# Altium PCB IBMExtender.PcbDoc (part 1 of 3)
Units mm, origin at the board's own origin, x right, y up, seen from the top; angles counter-clockwise.
Board outline 203.2 x 105.41 mm, 4 copper layers (F.Cu, In1.Cu, In2.Cu, B.Cu); 44 components, 158 nets, 598 pads, 425 vias.
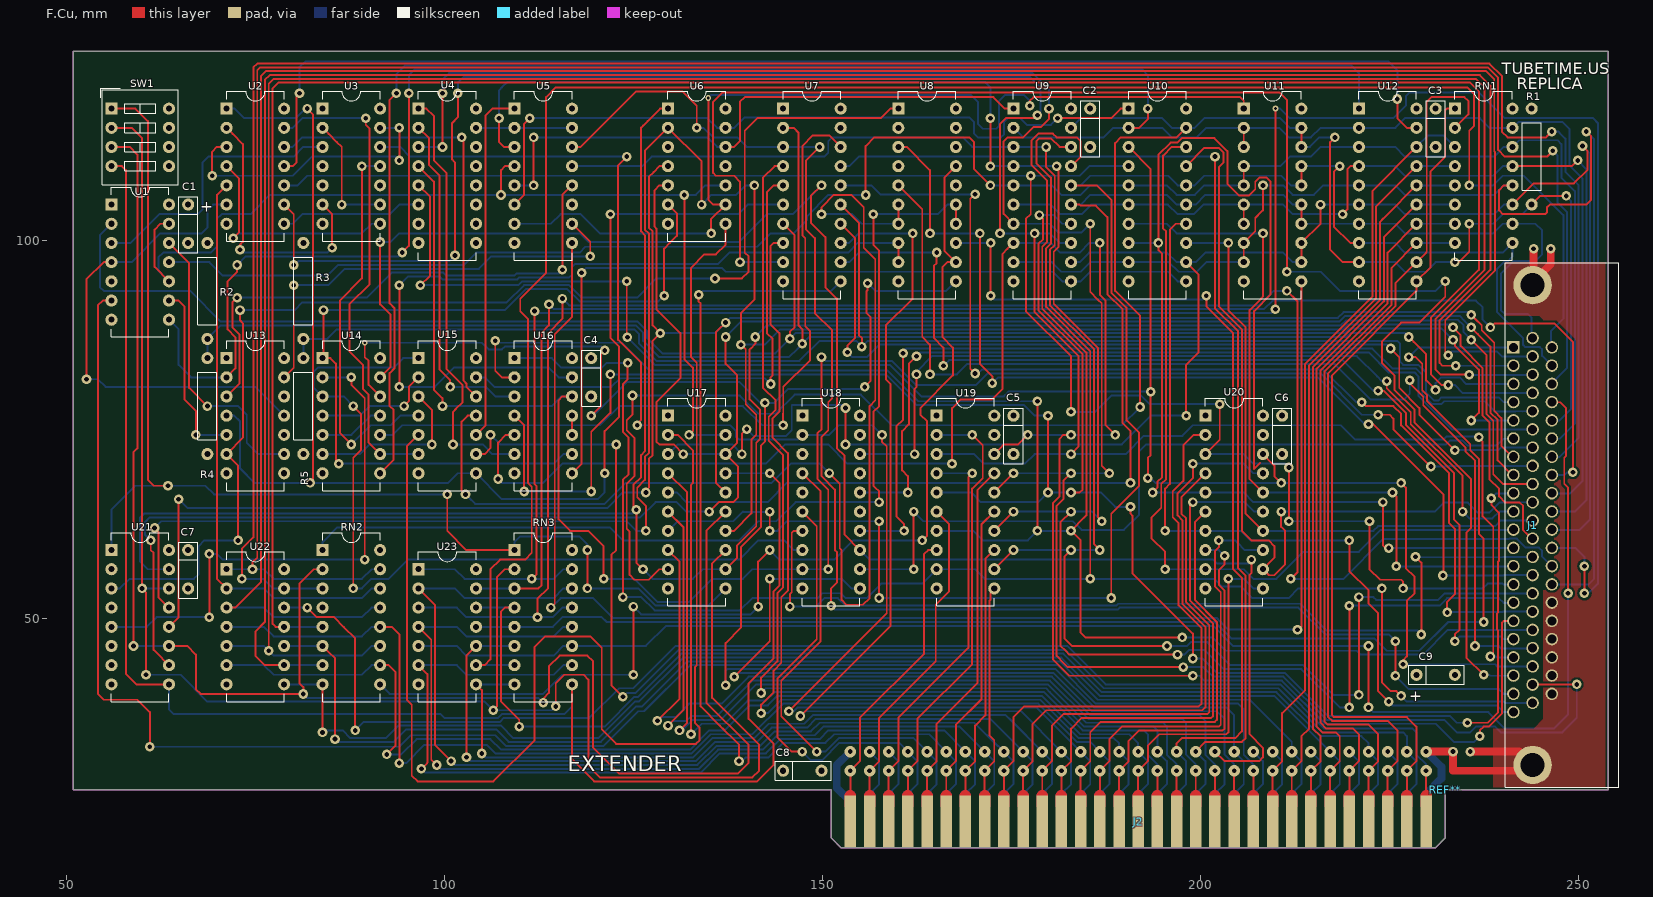
[diagram p0: F.Cu view]
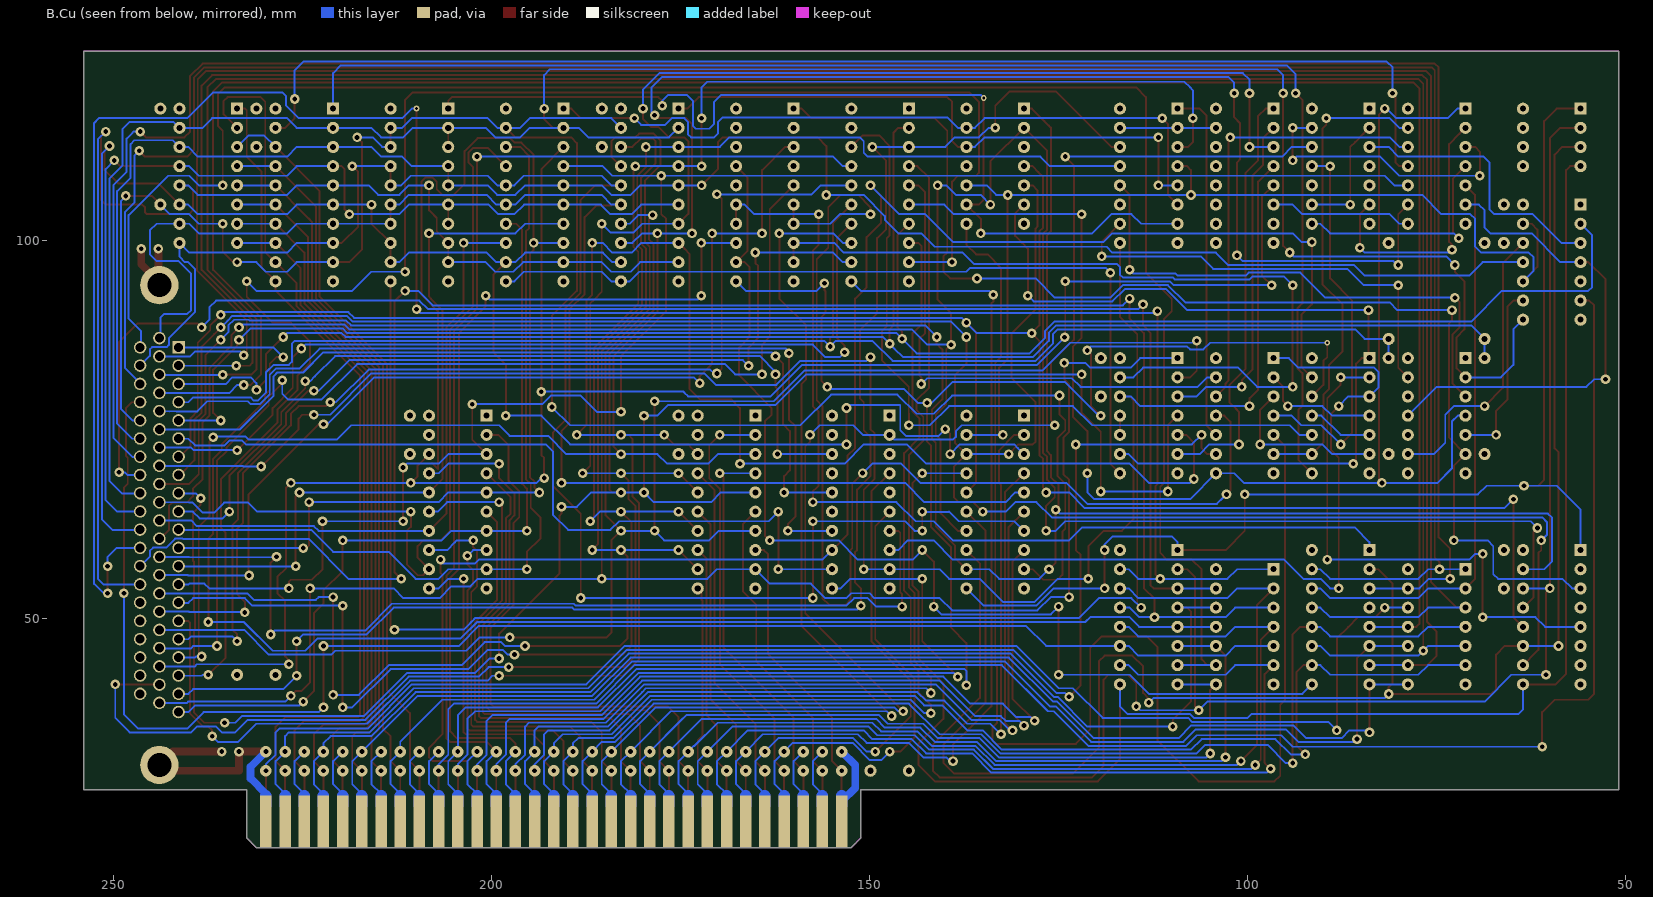
[diagram p1: B.Cu view, seen from below]
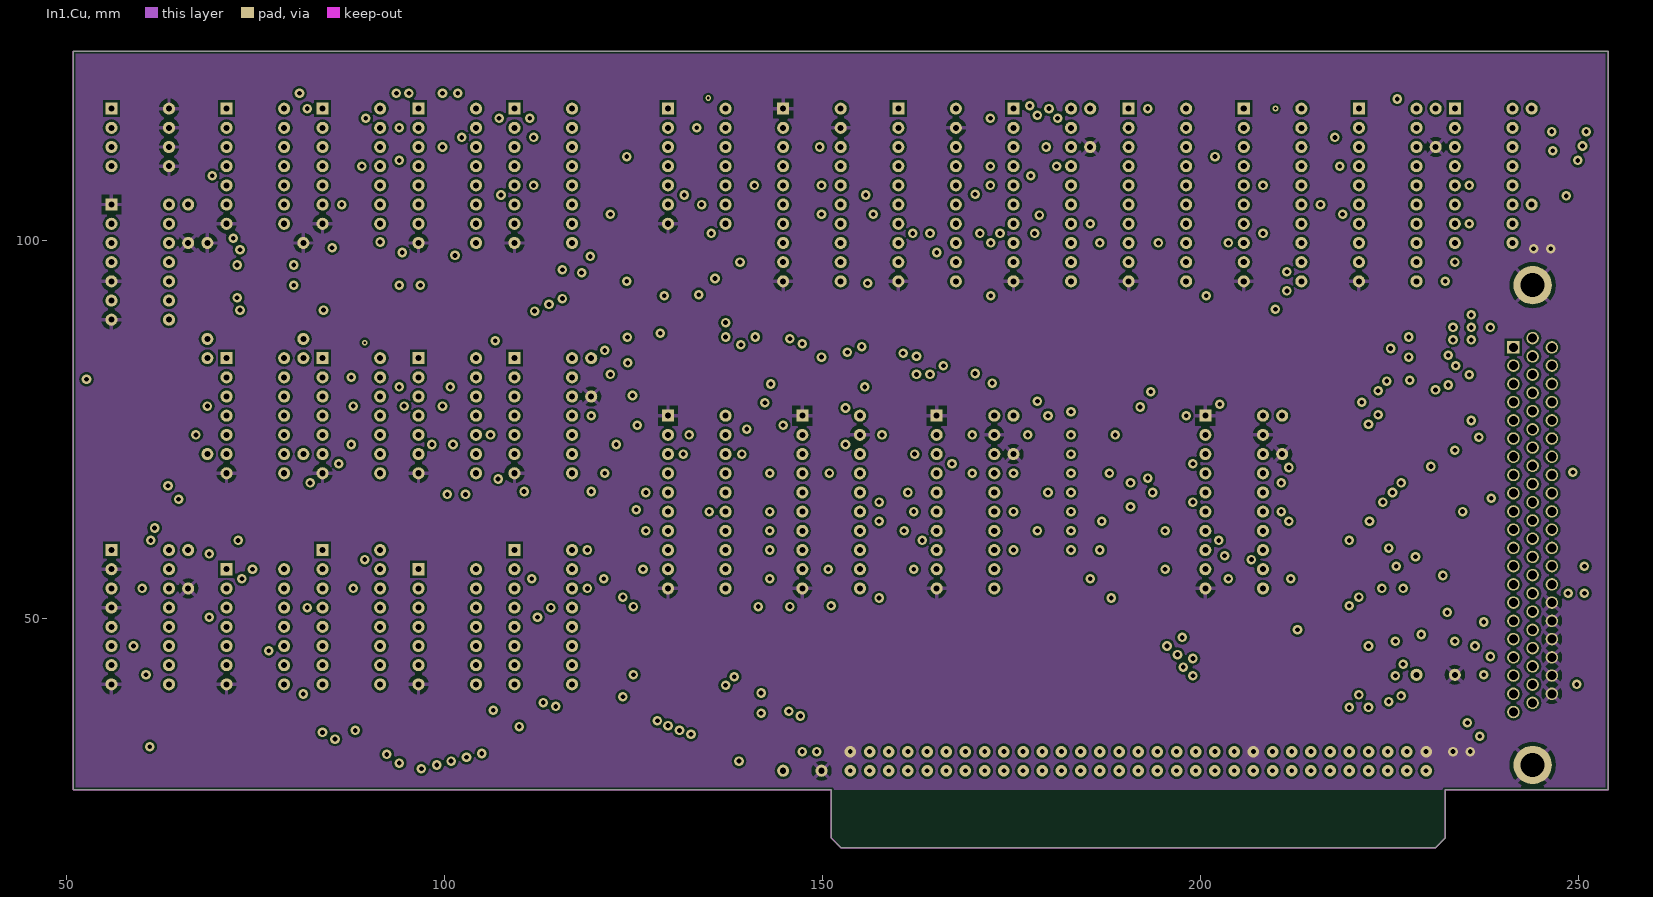
[diagram p2: In1.Cu]
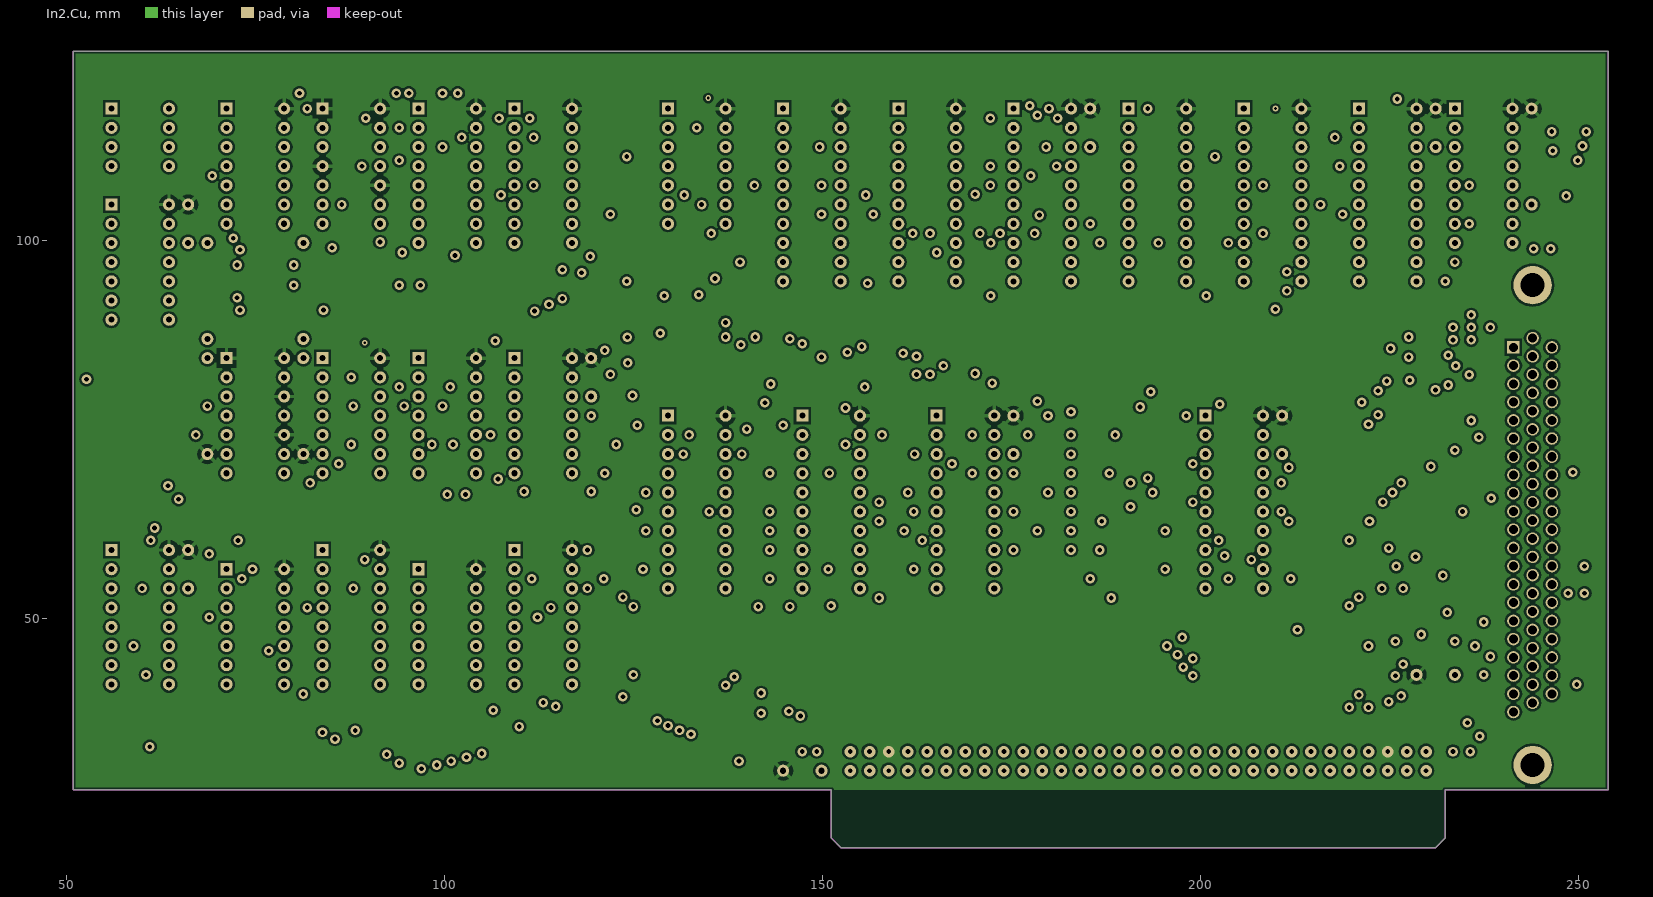
[diagram p3: In2.Cu]

## Layer stack, top to bottom
F.Mask: solder mask 0.0102, Solder Resist, Dk 3.5
F.Cu: signal copper 0.0356
Dielectric 1: dielectric 0.32, FR-4, Dk 4.8
In1.Cu: signal copper 0.0356
Dielectric2: dielectric 0.32, FR-4, Dk 4.8
In2.Cu: signal copper 0.0356
Dielectric3: dielectric 0.32, FR-4, Dk 4.8
B.Cu: signal copper 0.0356
B.Mask: solder mask 0.0102, Solder Resist, Dk 3.5

## Board outline
50.8,27.305 50.8,125.095 254,125.095 254,27.305 232.41,27.305 232.41,20.955 231.14,19.685 152.4,19.685 151.13,20.955 151.13,27.305 50.8,27.305

## Design rules (kind name [scope] priority, off if disabled: settings)
Clearance "Clearence 0.3048_Polygon" [InNamedPolygon('In1.Cu-GND') OR InNamedPolygon('In2.Cu-+5V') OR InNamedPolygon('F.Cu-GND')] p1: gap=0.305 ignorepadtopadclearanceinfootprint=FALSE
Clearance "Clearence 0.2286_NetClass" [InNetClass('Default')] p2: gap=0.229 ignorepadtopadclearanceinfootprint=FALSE
HoleSize "Hole Size (Default)" [All] p1: absolutevalues=TRUE maxlimit=10 minlimit=0.3 maxpercent=80.000 minpercent=20.000
MinimumSolderMaskSliver [All] p1: minsoldermaskwidth=0
PolygonConnect Polygon_F.Cu-GND_ConnectDirect [IsNamedPolygon('F.Cu-GND')] p1: connectstyle=Direct reliefconductorwidth=0.254 reliefentries=4 polygonreliefangle="90 Angle" airgapwidth=0.254
PolygonConnect Polygon_In2.Cu-+5V_ConnectDirect [IsNamedPolygon('In2.Cu-+5V') vs IsVia] p2: connectstyle=Direct reliefconductorwidth=0.254 reliefentries=4 polygonreliefangle="90 Angle" airgapwidth=0.254
PolygonConnect Polygon_In2.Cu-+5V_ConnectRelief45 [IsNamedPolygon('In2.Cu-+5V') vs (IsThruPin or IsSMTPin) and (PadShape_AllLayers = 'Round')] p3: connectstyle=Relief reliefconductorwidth=0.508 reliefentries=4 polygonreliefangle="45 Angle" airgapwidth=0.508
PolygonConnect Polygon_In2.Cu-+5V_ConnectRelief90 [IsNamedPolygon('In2.Cu-+5V') vs (IsThruPin or IsSMTPin) and (PadShape_AllLayers <> 'Round')] p4: connectstyle=Relief reliefconductorwidth=0.508 reliefentries=4 polygonreliefangle="90 Angle" airgapwidth=0.508
PolygonConnect Polygon_In1.Cu-GND_ConnectDirect [IsNamedPolygon('In1.Cu-GND') vs IsVia] p5: connectstyle=Direct reliefconductorwidth=0.254 reliefentries=4 polygonreliefangle="90 Angle" airgapwidth=0.254
PolygonConnect Polygon_In1.Cu-GND_ConnectRelief45 [IsNamedPolygon('In1.Cu-GND') vs (IsThruPin or IsSMTPin) and (PadShape_AllLayers = 'Round')] p6: connectstyle=Relief reliefconductorwidth=0.508 reliefentries=4 polygonreliefangle="45 Angle" airgapwidth=0.508
PolygonConnect Polygon_In1.Cu-GND_ConnectRelief90 [IsNamedPolygon('In1.Cu-GND') vs (IsThruPin or IsSMTPin) and (PadShape_AllLayers <> 'Round')] p7: connectstyle=Relief reliefconductorwidth=0.508 reliefentries=4 polygonreliefangle="90 Angle" airgapwidth=0.508
RoutingVias [All] p1: holewidth=0.711 width=1.27 viastyle="Through Hole" minholewidth=0.711 minwidth=1.27 maxholewidth=0.711 maxwidth=1.27
SilkToSilkClearance [All] p1: silktosilkclearance=0
SilkToSolderMaskClearance [IsPad] p1: minsilkscreentomaskgap=0 clearancetoexposedcopper=TRUE
SolderMaskExpansion [All] p1: expansion=0.102 istentingtop=FALSE
Width [All] p1: maxlimit=10 minlimit=0.254 preferedwidth=0.254 minimp=50.000000 maximp=50.000000 favimp=50.000000
26 further rules are at their usual default settings.

## Classes and differential pairs
net class Default: +5V A0 A1 A2 A3 A4 A5 A6 A7 A8 A9 A10 A11 A12 A13 A14 A15 A16 A17 A18 A19 AEN ALE CLK D0 D1 D2 D3 D4 D5 D6 D7 DACK0# DACK1# DACK2# DACK3# DATA_BUS_ENABLE# DIR_TO_CPU DRQ1 DRQ2 DRQ3 EA0 EA1 EA2 EA3 EA4 EA5 EA6 EA7 EA8 EA9 EA10 EA11 EA12 EA13 EA14 EA15 EA16 EA17 EA18 EA19 EAEN EALE ECLK ED0 ED1 ED2 ED3 ED4 ED5 ED6 ED7 EDACK0# EDACK1# EDACK2# EDACK3# EDIR# EDRQ1 EDRQ2 EDRQ3 EENABLE EIOCHCK# EIOCHRDY EIOR# EIOW# EIRQ2 EIRQ3 EIRQ4 EIRQ5 EIRQ6 EIRQ7 EMEM_IN_EXP EMEMR# EMEMW# ERESERVED ERESET# ET/C EXT_DISABLE GND IOCHCK IOCHRDY IOR# IOW# IRQ2 IRQ3 IRQ4 IRQ5 IRQ6 IRQ7 LOCAL_DIR MEM_IN_EXP MEMR# MEMW# Net-(RN2-Pad1) Net-(RN2-Pad2) Net-(RN2-Pad9) Net-(RN2-Pad14) Net-(RN3-Pad1) Net-(RN3-Pad2) Net-(RN3-Pad9) Net-(U1-Pad3) Net-(U1-Pad4) Net-(U1-Pad9) Net-(U1-Pad12) Net-(U2-Pad2) Net-(U2-Pad3) Net-(U2-Pad4) Net-(U2-Pad8) Net-(U3-Pad2) Net-(U4-Pad15) Net-(U5-Pad5) Net-(U10-Pad1) Net-(U10-Pad11) Net-(U11-Pad1) Net-(U11-Pad11) Net-(U13-Pad3) Net-(U14-Pad2) Net-(U14-Pad4) Net-(U14-Pad6) Net-(U14-Pad9) Net-(U14-Pad10) Net-(U14-Pad11) Net-(U15-Pad4) Net-(U15-Pad10) Net-(U15-Pad12) Net-(U15-Pad13) Net-(U16-Pad3) Net-(U16-Pad6) Net-(U16-Pad10) PIOR# PMEMW# PORT_211# READ_STATUS# RESERVED RESET RESET# ROM_ADDR# T/C

## Components (designator, comment, footprint, x,y, rotation, side; value= is the part's Value field where it differs from the comment)
C1 "10uF" C_Disc_D0.2in_W0.1in_P0.2in 66.04,104.775 r270 top
C2 "0.047uF" C_Disc_D0.2in_W0.1in_P0.2in 185.42,117.475 r270 top
C3 "0.047uF" C_Disc_D0.2in_W0.1in_P0.2in 231.14,117.475 r270 top
C4 "0.047uF" C_Disc_D0.2in_W0.1in_P0.2in 119.38,84.455 r270 top
C5 "0.047uF" C_Disc_D0.2in_W0.1in_P0.2in 175.26,76.835 r270 top
C6 "0.047uF" C_Disc_D0.2in_W0.1in_P0.2in 210.82,76.835 r270 top
C7 "0.047uF" C_Disc_D0.2in_W0.1in_P0.2in 66.04,59.055 r270 top
C8 "0.047uF" C_Disc_D0.2in_W0.1in_P0.2in 144.78,29.845 r0 top
C9 "10uF" C_Disc_D0.2in_W0.1in_P0.2in 228.6,42.545 r0 top
J1 "DB62" DB62 241.427,85.877 r270 top
J2 "Bus_ISA_8bit" BUS_PC 191.77,23.495 r0 top
R1 "4.7K" R_Axial_L0.26in_D0.92in_P0.5in_Horizontal 243.84,117.475 r270 top
R2 "330" R_Axial_L0.26in_D0.92in_P0.5in_Horizontal 68.58,86.995 r90 top
R3 "330" R_Axial_L0.26in_D0.92in_P0.5in_Horizontal 81.28,86.995 r90 top
R4 "220" R_Axial_L0.26in_D0.92in_P0.5in_Horizontal 68.58,71.755 r90 top
R5 "220" R_Axial_L0.26in_D0.92in_P0.5in_Horizontal 81.28,71.755 r90 top
REF** "MNT_KEYSTONE_9200" MNT_KEYSTONE_9200 232.41,27.305 r0 top
RN1 "RPAC15_BUSSED" DIP254P762X635-16 233.68,117.475 r0 top
RN2 "8.2K" DIP254P762X635-16 83.82,59.055 r0 top
RN3 "8.2K" DIP254P762X635-16 109.22,59.055 r0 top
SW1 "SW_DIP_x04" SW_DIP_x4_W7.62mm_Slide 55.88,117.475 r0 top
U1 "74LS125" DIP254P762X635-14 55.88,104.775 r0 top
U2 "74S08" DIP254P762X635-14 71.12,117.475 r0 top
U3 "74S74" DIP254P762X635-14 83.82,117.475 r0 top
U4 "74LS138" DIP254P762X635-16 96.52,117.475 r0 top
U5 "74LS155" DIP254P762X635-16 109.22,117.475 r0 top
U6 "74LS20" DIP254P762X635-14 129.54,117.475 r0 top
U7 "74LS244" DIP254P762X635-20 144.78,117.475 r0 top
U8 "74LS244" DIP254P762X635-20 160.02,117.475 r0 top
U9 "74LS374" DIP254P762X635-20 175.26,117.475 r0 top
U10 "74LS374" DIP254P762X635-20 190.5,117.475 r0 top
U11 "74LS374" DIP254P762X635-20 205.74,117.475 r0 top
U12 "74LS245" DIP254P762X635-20 220.98,117.475 r0 top
U13 "74LS74" DIP254P762X635-14 71.12,84.455 r0 top
U14 "74LS00" DIP254P762X635-14 83.82,84.455 r0 top
U15 "74LS04" DIP254P762X635-14 96.52,84.455 r0 top
U16 "74LS32" DIP254P762X635-14 109.22,84.455 r0 top
U17 "74LS244" DIP254P762X635-20 129.54,76.835 r0 top
U18 "74LS244" DIP254P762X635-20 147.32,76.835 r0 top
U19 "74LS244" DIP254P762X635-20 165.1,76.835 r0 top
U20 "74LS244" DIP254P762X635-20 200.66,76.835 r0 top
U21 "74LS85" DIP254P762X635-16 55.88,59.055 r0 top
U22 "SN7417" DIP254P762X635-14 71.12,56.515 r0 top
U23 "SN7417" DIP254P762X635-14 96.52,56.515 r0 top

## Footprints (in the part's own frame and the unit in brackets; to place one, negate y for a bottom-side part, rotate by r counter-clockwise, add the part's x,y. Pads: shape width x height; smd on the part's side, far side on the other; paste and mask are expansions set on the pad)
BUS_PC [mil]
  rect 60x270 smd far side paste-270 mask+7.87: 1(1500,-15) 2(1400,-15) 3(1300,-15) 4(1200,-15) 5(1100,-15) 6(1000,-15) 7(900,-15) 8(800,-15) 9(700,-15) 10(600,-15) 11(500,-15) 12(400,-15) 13(300,-15) 14(200,-15) 15(100,-15) 16(0,-15) 17(-100,-15) 18(-200,-15) 19(-300,-15) 20(-400,-15) 21(-500,-15) 22(-600,-15) 23(-700,-15) 24(-800,-15) 25(-900,-15) 26(-1000,-15) 27(-1100,-15) 28(-1200,-15) 29(-1300,-15) 30(-1400,-15) 31(-1500,-15)
  rect 60x270 smd paste-270 mask+7.87: 32(1500,-15) 33(1400,-15) 34(1300,-15) 35(1200,-15) 36(1100,-15) 37(1000,-15) 38(900,-15) 39(800,-15) 40(700,-15) 41(600,-15) 42(500,-15) 43(400,-15) 44(300,-15) 45(200,-15) 46(100,-15) 47(0,-15) 48(-100,-15) 49(-200,-15) 50(-300,-15) 51(-400,-15) 52(-500,-15) 53(-600,-15) 54(-700,-15) 55(-800,-15) 56(-900,-15) 57(-1000,-15) 58(-1100,-15) 59(-1200,-15) 60(-1300,-15) 61(-1400,-15) 62(-1500,-15)
  F.Cu lines w60: -1500,70 -1500,120 ; -1400,70 -1400,120 ; -1300,70 -1300,120 ; -1200,70 -1200,120 ; -1100,70 -1100,120 ; -1000,70 -1000,120 ; -900,70 -900,120 ; -800,70 -800,120 ; -700,70 -700,120 ; -600,70 -600,120 ; -500,70 -500,120 ; -400,70 -400,120 ; -300,70 -300,120 ; -200,70 -200,120 ; -100,70 -100,120 ; 0,70 0,120 ; 100,70 100,120 ; 200,70 200,120 ; 300,70 300,120 ; 400,70 400,120 ; 500,70 500,120 ; 600,70 600,120 ; 700,70 700,120 ; 800,70 800,120 ; 900,70 900,120 ; 1000,70 1000,120 ; 1100,70 1100,120 ; 1200,70 1200,120 ; 1300,70 1300,120 ; 1400,70 1400,120 ; 1500,70 1500,120
  B.Cu lines w60: -1500,70 -1500,120 ; -1400,70 -1400,120 ; -1300,70 -1300,120 ; -1200,70 -1200,120 ; -1100,70 -1100,120 ; -1000,70 -1000,120 ; -900,70 -900,120 ; -800,70 -800,120 ; -700,70 -700,120 ; -600,70 -600,120 ; -500,70 -500,120 ; -400,70 -400,120 ; -300,70 -300,120 ; -200,70 -200,120 ; -100,70 -100,120 ; 0,70 0,120 ; 100,70 100,120 ; 200,70 200,120 ; 300,70 300,120 ; 400,70 400,120 ; 500,70 500,120 ; 600,70 600,120 ; 700,70 700,120 ; 800,70 800,120 ; 900,70 900,120 ; 1000,70 1000,120 ; 1100,70 1100,120 ; 1200,70 1200,120 ; 1300,70 1300,120 ; 1400,70 1400,120 ; 1500,70 1500,120
C_Disc_D0.2in_W0.1in_P0.2in [mm]
  round 1.6 hole 0.8 paste-1.6 mask+0.2: 1(0,0) 2(5.08,0)
  silkscreen extent -1.02,-1.27 6.35,1.27
DB62 [mil]
  rect 65x65 hole 47 paste-65 mask+7.87: 1(0,0)
  round 65 hole 47 paste-65 mask+7.87: 2(95,0) 3(190,0) 4(285,0) 5(380,0) 6(475,0) 7(570,0) 8(665,0) 9(760,0) 10(855,0) 11(950,0) 12(1045,0) 13(1140,0) 14(1235,0) 15(1330,0) 16(1425,0) 17(1520,0) 18(1615,0) 19(1710,0) 20(1805,0) 21(1900,0) 22(-48,100) 23(47,100) 24(142,100) 25(237,100) 26(332,100) 27(427,100) 28(522,100) 29(617,100) 30(712,100) 31(807,100) 32(902,100) 33(997,100) 34(1092,100) 35(1187,100) 36(1282,100) 37(1377,100) 38(1472,100) 39(1567,100) 40(1662,100) 41(1757,100) 42(1852,100) 43(0,200) 44(95,200) 45(190,200) 46(285,200) 47(380,200) 48(475,200) 49(570,200) 50(665,200) 51(760,200) 52(855,200) 53(950,200) 54(1045,200) 55(1140,200) 56(1235,200) 57(1330,200) 58(1425,200) 59(1520,200) 60(1615,200) 61(1710,200) 62(1805,200)
  round 200 hole 125 paste-200 mask+7.87: 63(-324,100) 63(2176,100)
  silkscreen extent -440,-43 2292,550
DIP254P762X635-14 [mm]
  rect 1.6x1.6 hole 0.8 paste-1.6 mask+0.2: 1(0,0)
  rrect100% 1.6x1.6 hole 0.8 paste-1.6 mask+0.2: 2(0,-2.54) 3(0,-5.08) 4(0,-7.62) 5(0,-10.16) 6(0,-12.7) 7(0,-15.24) 8(7.62,-15.24) 9(7.62,-12.7) 10(7.62,-10.16) 11(7.62,-7.62) 12(7.62,-5.08) 13(7.62,-2.54) 14(7.62,0)
  silkscreen extent 0,-17.53 7.62,2.29
DIP254P762X635-16 [mm]
  rect 1.6x1.6 hole 0.8 paste-1.6 mask+0.2: 1(0,0)
  rrect100% 1.6x1.6 hole 0.8 paste-1.6 mask+0.2: 2(0,-2.54) 3(0,-5.08) 4(0,-7.62) 5(0,-10.16) 6(0,-12.7) 7(0,-15.24) 8(0,-17.78) 9(7.62,-17.78) 10(7.62,-15.24) 11(7.62,-12.7) 12(7.62,-10.16) 13(7.62,-7.62) 14(7.62,-5.08) 15(7.62,-2.54) 16(7.62,0)
  silkscreen extent 0,-20.07 7.62,2.29
DIP254P762X635-20 [mm]
  rect 1.6x1.6 hole 0.8 paste-1.6 mask+0.2: 1(0,0)
  rrect100% 1.6x1.6 hole 0.8 paste-1.6 mask+0.2: 2(0,-2.54) 3(0,-5.08) 4(0,-7.62) 5(0,-10.16) 6(0,-12.7) 7(0,-15.24) 8(0,-17.78) 9(0,-20.32) 10(0,-22.86) 11(7.62,-22.86) 12(7.62,-20.32) 13(7.62,-17.78) 14(7.62,-15.24) 15(7.62,-12.7) 16(7.62,-10.16) 17(7.62,-7.62) 18(7.62,-5.08) 19(7.62,-2.54) 20(7.62,0)
  silkscreen extent 0,-25.15 7.62,2.29
MNT_KEYSTONE_9200 [mm]
R_Axial_L0.26in_D0.92in_P0.5in_Horizontal [mm]
  round 1.6 hole 0.8 paste-1.6 mask+0.2: 1(0,0)
  rrect100% 1.6x1.6 hole 0.8 paste-1.6 mask+0.2: 2(12.7,0)
  silkscreen extent 1.9,-1.27 10.79,1.27
SW_DIP_x4_W7.62mm_Slide [mm]
  rect 1.6x1.6 hole 0.8 paste-1.6 mask+0.2: 1(0,0)
  rrect100% 1.6x1.6 hole 0.8 paste-1.6 mask+0.2: 2(0,-2.54) 3(0,-5.08) 4(0,-7.62) 5(7.62,-7.62) 6(7.62,-5.08) 7(7.62,-2.54) 8(7.62,0)
  silkscreen extent -1.4,-10.1 8.82,2.68

## Part data
C1 C2 C3 C4 C5 C6 C7 C8 C9: library part C_Disc_D0.2in_W0.1in_P0.2in, "C, Disc series, Radial, pin pitch=5.00mm, , diameter*width=5*2.5mm^2, Capacitor, http://cdn-reichelt.de/documents/datenblatt/B300/DS_KERKO_TC.pdf"
J2: library part BUS_PC, "Connecteur Bus AT ISA 16 bits"
R1 R2 R3 R4 R5: library part R_Axial_L0.26in_D0.92in_P0.5in_Horizontal, "Resistor, Axial_DIN0309 series, Axial, Horizontal, pin pitch=12.7mm, 0.5W = 1/2W, length*diameter=9*3.2mm^2, http://cdn-reichelt.de/documents/datenblatt/B400/1_4W%23YAG.pdf"
RN1 RN2 RN3 U4 U5 U21: library part DIP254P762X635-16, "16-lead dip package, row spacing 7.62 mm (300 mils)"
SW1: library part SW_DIP_x4_W7.62mm_Slide, "4x-dip-switch, Slide, row spacing 7.62 mm (300 mils)"
U1 U2 U3 U6 U13 U14 U15 U16 U22 U23: library part DIP254P762X635-14, "14-lead dip package, row spacing 7.62 mm (300 mils)"
U7 U8 U9 U10 U11 U12 U17 U18 U19 U20: library part DIP254P762X635-20, "20-lead dip package, row spacing 7.62 mm (300 mils)"

## Via types
v1: diameter 1.27, hole 0.635, F.Cu to B.Cu, tented both sides, 360 vias
v2: diameter 1.524, hole 0.635, F.Cu to B.Cu, tented both sides, 62 vias
v3: diameter 0.762, hole 0.381, F.Cu to B.Cu, tented both sides, 3 vias

## Nets (pads, with @x,y where several pads share a name; then routed paths per layer and width w, separated by ;. In a path a pad name is that pad's centre, name@x,y a point inside that pad or via, vN(x,y) a via of type N, cw(c..) or ccw(c..) an arc to the next point about the centre after c; other vN are vias at no path point)
+5V: C1.1 C2.1 C3.1 C4.1 C5.1 C6.1 C7.1 C8.1 C9.1 J2.3 J2.29 R1.1 R4.1 R5.1 RN1.16 RN2.16 RN3.16 U1.14 U2.14 U3.1 U3.4 U3.10 U3.14 U4.16 U5.16 U6.14 U7.20 U8.20 U9.20 U10.20 U11.20 U12.20 U13.1 U13.10 U13.12 U13.14 U14.14 U15.14 U16.14 U17.20 U18.20 U19.20 U20.20 U21.16 U22.14 U23.14 | length 24.3
  B.Cu w0.254: 158.75,26.793 J2.29@158.75,23.114 158.75,26.797 160.02,28.067 160.02,30.099 160.02,31.115 v2(158.75,32.385) ; J2.3@224.79,23.114 224.79,26.793 226.06,28.063 226.06,31.115 v2(224.79,32.385)
A0: J2.62 U19.8 | length 41.3
  F.Cu w0.254: J2.62@153.67,23.114 153.67,26.797 v2(153.67,29.845) 154.94,31.115 154.94,36.83 163.449,45.339 163.449,58.547 163.957,59.055 U19.8@165.1,59.055
A1: J2.61 U19.6 | length 46.1
  F.Cu w0.254: J2.61@156.21,23.114 156.21,26.797 v2(156.21,29.845) 157.48,31.115 157.48,36.83 164.973,44.323 164.973,51.816 166.751,53.594 166.751,62.484 U19.6@165.1,64.135
A2: J2.60 U19.4 | length 55.4
  F.Cu w0.254: J2.60@158.75,23.114 v2(158.75,29.845) 160.02,31.115 160.02,36.83 169.291,46.101 169.291,68.707 v1(169.799,69.215)
  B.Cu w0.254: U19.4@165.1,69.215 166.231,69.215 168.91,69.215 v1(169.799,69.215)
A3: J2.59 U19.2 | length 60.6
  F.Cu w0.254: J2.59@161.29,23.114 v2(161.29,29.845) 162.56,31.115 162.56,36.703 169.799,43.942 169.799,67.183 171.196,68.58 171.196,72.898 v1(169.799,74.295)
  B.Cu w0.254: U19.2@165.1,74.295 v1(169.799,74.295)
A4: J2.58 U19.17 | length 49.8
  F.Cu w0.254: J2.58@163.83,23.114 v2(163.83,29.845) 165.1,31.115 165.1,36.068 170.523,41.491 170.523,67.018 171.069,67.564 U19.17@172.72,69.215
A5: J2.57 U19.15 | length 43.7
  F.Cu w0.254: J2.57@166.37,23.114 v2(166.37,29.845) 167.64,31.115 167.64,35.941 171.031,39.332 171.031,62.446 U19.15@172.72,64.135
A6: J2.56 U19.13 | length 37.5
  F.Cu w0.254: J2.56@168.91,23.114 168.91,26.797 v2(168.91,29.845) 170.18,31.115 170.18,35.814 171.539,37.173 171.539,57.874 U19.13@172.72,59.055
A7: J2.55 U19.11 | length 31.9
  F.Cu w0.254: J2.55@171.45,23.114 v2(171.45,29.845) 172.72,31.115 172.72,33.909 172.085,34.544 172.085,52.324 172.212,52.451 172.212,53.467 U19.11@172.72,53.975
A8: J2.54 U20.2 | length 79.8
  F.Cu w0.254: J2.54@173.99,23.114 v2(173.99,29.845) 175.26,31.115 175.26,36.957 176.657,38.354 199.771,38.354 200.152,38.735 200.152,48.685 197.104,51.733 197.104,51.736 197.104,62.611 196.342,63.373 196.342,66.802 197.739,68.199 197.739,72.898 199.136,74.295 U20.2@200.66,74.295
A9: J2.53 U20.17 | length 81.7
  F.Cu w0.254: J2.53@176.53,23.114 v2(176.53,29.845) 177.8,31.115 177.8,36.068 179.578,37.846 200.279,37.846 200.66,38.227 200.66,48.895 197.866,51.689 197.866,51.693 197.612,51.947 197.612,62.992 196.977,63.627 196.977,66.548 199.009,68.58 v1(199.009,70.485)
  B.Cu w0.254: v1(199.009,70.485) 205.74,70.485 207.01,69.215 U20.17@208.28,69.215
A10: J2.52 U20.4 | length 69.3
  F.Cu w0.254: J2.52@179.07,23.114 v2(179.07,29.845) 180.34,31.115 180.34,35.814 181.864,37.338 200.914,37.338 201.168,37.592 201.168,49.109 198.12,52.157 198.12,63.246 197.485,63.881 197.485,66.04 198.882,67.437 U20.4@200.66,69.215
A11: J2.51 U20.15 | length 71.9
  F.Cu w0.254: J2.51@181.61,23.114 v2(181.61,29.845) 182.88,31.115 182.88,35.433 184.277,36.83 201.422,36.83 201.676,37.084 201.676,49.32 198.628,52.368 198.628,65.024 v1(199.009,65.405)
  B.Cu w0.254: v1(199.009,65.405) 205.879,65.405 207.149,64.135 U20.15@208.28,64.135
A12: J2.50 U20.6 | length 59.1
  F.Cu w0.254: J2.50@184.15,23.114 184.15,26.797 v2(184.15,29.845) 185.42,31.115 185.42,34.925 186.817,36.322 201.93,36.322 202.184,36.576 202.184,49.53 199.263,52.451 199.263,62.738 199.39,62.865 U20.6@200.66,64.135
A13: J2.49 U20.13 | length 58.2
  F.Cu w0.254: J2.49@186.69,23.114 v2(186.69,29.845) 187.96,31.115 187.96,34.036 189.611,35.687 202.438,35.687 202.692,35.941 202.692,53.467 201.93,54.229 201.93,58.801 201.93,58.919 202.438,59.427 v1(202.438,60.325)
  B.Cu w0.254: v1(202.438,60.325) 204.597,60.325 204.851,60.071 205.867,59.055 U20.13@208.28,59.055
A14: J2.48 U20.8 | length 50.9
  F.Cu w0.254: J2.48@189.23,23.114 v2(189.23,29.845) 190.5,31.115 190.5,33.782 191.897,35.179 202.946,35.179 203.2,35.433 203.2,53.677 202.438,54.439 202.438,56.388 203.2,57.15 v1(203.2,58.293)
  B.Cu w0.254: U20.8@200.66,59.055 202.438,59.055 v1(203.2,58.293)
A15: J2.47 U20.11 | length 47.4
  F.Cu w0.254: J2.47@191.77,23.114 191.77,26.797 v2(191.77,29.845) 193.04,31.115 193.04,33.147 194.564,34.671 203.454,34.671 203.708,34.925 v1(203.708,55.245)
  B.Cu w0.254: v1(203.708,55.245) 205.74,55.245 207.01,53.975 U20.11@208.28,53.975
A16: J2.46 U17.2 | length 119
  F.Cu w0.254: U17.2@129.54,74.295 130.81,74.295 132.842,72.263 132.842,67.945 132.588,67.691 132.588,35.56 v1(132.588,34.671) ; J2.46@194.31,23.114 v2(194.31,29.845)
  B.Cu w0.254: v1(132.588,34.671) 133.985,36.068 137.033,36.068 140.081,39.116 142.494,39.116 143.637,40.259 149.606,40.259 179.324,40.259 184.404,35.179 192.532,35.179 193.04,34.671 193.04,31.963 194.31,30.693 v2(194.31,29.845)
A17: J2.45 U17.4 | length 118
  F.Cu w0.254: U17.4@129.54,69.215 132.08,66.675 132.08,36.195 v1(131.064,35.179) ; J2.45@196.85,23.114 196.85,28.767 v2(196.85,29.845)
  B.Cu w0.254: v1(131.064,35.179) 131.445,35.179 132.842,36.576 136.525,36.576 141.224,41.275 145.919,41.275 179.788,41.275 184.868,36.195 195.072,36.195 195.58,35.687 195.58,31.963 196.85,30.693 v2(196.85,29.845)
A18: J2.44 U17.6 | length 117
  F.Cu w0.254: v1(129.54,35.814) 131.572,37.846 131.572,62.103 U17.6@129.54,64.135 ; J2.44@199.39,23.114 v2(199.39,29.845)
  B.Cu w0.254: v1(129.54,35.814) 130.175,36.449 131.953,36.449 132.588,37.084 136.017,37.084 140.716,41.783 141.224,41.783 145.709,41.783 180.086,41.783 185.166,36.703 197.612,36.703 198.12,36.195 198.12,31.963 199.39,30.693 v2(199.39,29.845)
A19: J2.43 U17.8 | length 116.2
  F.Cu w0.254: v1(128.143,36.449) 131.064,39.37 131.064,43.307 ; U17.8@129.54,59.055 131.064,57.531 131.064,43.307 ; 131.064,43.053 131.064,43.307 ; J2.43@201.93,23.114 201.93,28.767 v2(201.93,29.845)
  B.Cu w0.254: v1(128.143,36.449) 128.651,36.957 130.556,36.957 132.334,38.735 136.652,38.735 140.208,42.291 141.478,42.291 145.498,42.291 ; 145.499,42.291 146.177,42.291 ; 145.908,42.291 146.177,42.291 ; v2(201.93,29.845) 201.93,30.693 200.66,31.963 200.66,36.449 199.898,37.211 185.42,37.211 180.34,42.291 146.177,42.291
AEN: J2.42 U18.11 | length 109.1
  F.Cu w0.254: v1(138.303,42.291) 143.002,46.99 143.002,48.768 v1(143.002,55.245) ; J2.42@204.47,23.114 v2(204.47,29.845)
  B.Cu w0.254: v1(138.303,42.291) 138.811,42.799 142.494,42.799 142.879,42.799 ; 142.88,42.799 145.288,42.799 145.542,42.799 180.42,42.799 180.55,42.799 185.63,37.719 202.184,37.719 203.2,36.703 203.2,31.963 204.47,30.693 v2(204.47,29.845) ; v1(143.002,55.245) 143.891,55.245 144.399,55.245 152.539,55.245 153.809,53.975 U18.11@154.94,53.975
ALE: J2.28 U18.6 | length 66.9
  F.Cu w0.254: 144.018,35.179 144.018,35.306 ; v1(147.32,32.385) 145.914,32.385 144.018,34.281 144.018,35.306 ; U18.6@147.32,64.135 149.225,62.23 149.225,47.244 144.018,42.037 144.018,40.049 144.018,35.306
  B.Cu w0.254: v1(147.32,32.385) 148.463,31.242 148.717,31.242 149.943,31.242 152.229,33.528 160.147,33.528 v2(161.29,32.385) 162.56,31.115 162.56,28.067 161.29,26.797 J2.28@161.29,23.114 161.29,26.793
CLK: J2.20 U7.13 | length 128.9
  F.Cu w0.254: v1(147.066,37.084) 159.004,49.022 159.004,50.038 159.004,81.026 158.369,81.661 158.369,88.773 161.671,92.075 ; 161.798,92.202 161.671,92.075 ; v1(161.925,100.965) 161.925,92.329 161.671,92.075
  B.Cu w0.254: v1(147.066,37.084) 147.574,37.592 147.701,37.719 149.606,37.719 150.876,37.719 176.276,37.719 v2(181.61,32.385) 182.88,31.115 182.88,28.063 181.61,26.793 J2.20@181.61,23.114 ; U7.13@152.4,99.695 153.531,99.695 154.801,100.965 161.036,100.965 ; v1@161.798,100.965 161.036,100.965 ; v1(161.925,100.965) 161.036,100.965
D0: J2.40 RN1.3 U12.18 | length 103.5
  F.Cu w0.254: J2.40@209.55,23.114 v2(209.55,29.845) 210.82,31.115 210.82,37.465 213.868,40.513 213.868,83.693 222.758,92.583 222.758,106.553 U12.18@228.6,112.395
  B.Cu w0.254: U12.18@228.6,112.395 230.124,113.919 232.156,113.919 RN1.3@233.68,112.395
D1: J2.39 RN1.4 U12.17 | length 98.7
  F.Cu w0.254: J2.39@212.09,23.114 212.09,28.767 v2(212.09,29.845) 213.36,31.115 213.36,34.417 214.376,35.433 214.376,83.483 223.266,92.373 223.266,104.521 U12.17@228.6,109.855
  B.Cu w0.254: U12.17@228.6,109.855 229.731,109.855 RN1.4@233.68,109.855
D2: J2.38 RN1.5 U12.16 | length 98.7
  F.Cu w0.254: J2.38@214.63,23.114 214.63,28.767 v2(214.63,29.845) 215.9,31.115 215.9,34.417 214.884,35.433 214.884,83.272 223.774,92.162 223.774,100.457 ; 224.028,102.743 224.536,103.251 ; U12.16@228.6,107.315 224.536,103.251 ; 223.774,100.457 223.774,102.489 ; 223.774,100.457 223.774,100.965 223.774,102.489 ; 223.774,102.489 224.536,103.251
  B.Cu w0.254: U12.16@228.6,107.315 RN1.5@233.68,107.315
D3: J2.37 RN1.6 U12.15 | length 95
  F.Cu w0.254: J2.37@217.17,23.114 v2(217.17,29.845) 218.44,31.115 218.44,34.417 217.932,34.925 216.154,34.925 215.392,35.687 215.392,83.062 224.282,91.952 224.282,100.457 U12.15@228.6,104.775
  B.Cu w0.254: U12.15@228.6,104.775 229.731,104.775 RN1.6@233.68,104.775
D4: J2.36 RN1.7 U12.14 | length 94.2
  F.Cu w0.254: J2.36@219.71,23.114 v2(219.71,29.845) 220.98,31.115 220.98,34.671 220.218,35.433 216.662,35.433 215.9,36.195 215.9,82.851 224.79,91.741 224.79,98.425 U12.14@228.6,102.235
  B.Cu w0.254: U12.14@228.6,102.235 229.731,102.235 RN1.7@233.68,102.235
D5: J2.35 RN1.8 U12.13 | length 93.3
  F.Cu w0.254: J2.35@222.25,23.114 v2(222.25,29.845) 223.52,31.115 223.52,34.671 222.25,35.941 216.872,35.941 216.408,36.405 216.408,82.641 225.298,91.531 225.298,96.393 U12.13@228.6,99.695
  B.Cu w0.254: U12.13@228.6,99.695 229.731,99.695 RN1.8@233.68,99.695
D6: J2.34 RN1.2 U12.12 | length 119.6
  F.Cu w0.254: J2.34@224.79,23.114 v2(224.79,29.845) 226.06,31.115 226.06,35.179 224.79,36.449 217.424,36.449 216.916,36.957 216.916,82.43 225.806,91.32 225.806,94.361 U12.12@228.6,97.155 229.87,98.425 229.959,98.514 229.959,118.402 230.556,118.999 234.95,118.999 235.458,118.491 235.458,116.713 RN1.2@233.68,114.935
D7: J2.33 RN1.1 U12.11 | length 112.5
  F.Cu w0.254: J2.33@227.33,23.114 227.33,28.767 v2(227.33,29.845) 228.6,31.115 228.6,35.687 227.33,36.957 217.678,36.957 217.424,37.211 217.424,82.169 228.6,93.345 U12.11@228.6,94.615 230.467,96.482 230.467,109.182 232.41,111.125 232.41,117.259 232.626,117.475 RN1.1@233.68,117.475
DACK0#: J2.19 U3.12 U18.2 | length 207.6
  F.Cu w0.254: v1(124.079,111.125) 122.936,109.982 122.936,86.868 125.984,83.82 125.984,76.327 125.476,75.819 v1(125.476,75.565) ; v1(145.542,37.719) 158.496,50.673 158.496,52.705 158.496,70.866 158.496,72.762 157.861,73.397 v1(157.861,74.295)
  B.Cu w0.254: U3.12@91.44,112.395 94.107,112.395 95.377,111.125 v1(124.079,111.125) ; v1(125.476,75.565) 127,75.565 137.795,75.565 138.557,74.803 138.557,74.041 138.938,73.66 146.685,73.66 U18.2@147.32,74.295 150.876,74.295 152.146,75.565 155.575,75.565 156.591,75.565 v1(157.861,74.295) ; v1(145.542,37.719) 146.177,37.719 146.515,38.056 146.685,38.227 150.244,38.227 ; 150.244,38.227 150.665,38.227 177.038,38.227 178.308,38.227 ; J2.19@184.15,23.114 184.15,26.793 185.42,28.063 185.42,31.115 v2(184.15,32.385) ; 178.308,38.227 178.366,38.169 v2(184.15,32.385) ; 178.308,38.227 v2(184.15,32.385)
DACK1#: J2.17 U7.8 | length 129
  F.Cu w0.254: v1(141.859,37.465) 141.859,38.608 143.51,40.259 143.51,43.097 144.526,44.113 144.526,52.788 145.415,53.677 145.415,71.882 143.383,73.914 143.383,76.482 144.287,77.387 144.287,83.297 144.272,83.312 144.272,87.757 143.129,88.9 143.129,99.314 143.51,99.695 U7.8@144.78,99.695
  B.Cu w0.254: v1(141.859,37.465) 142.757,37.465 144.272,38.98 ; 144.272,38.989 144.272,38.98 ; J2.17@189.23,23.114 189.23,26.793 190.5,28.063 190.5,31.115 v2(189.23,32.385) 189.23,33.463 188.53,34.163 183.896,34.163 178.816,39.243 150.368,39.243 ; 144.272,38.98 144.535,39.243 150.114,39.243 ; 150.114,39.243 150.368,39.243 ; 150.114,39.243 150.368,39.243
DACK2#: J2.26 U7.11 | length 125.4
  F.Cu w0.254: v1(133.604,92.837) 133.604,91.939 133.858,91.685 133.858,74.993 133.858,70.993 133.858,38.354 136.398,35.814 ; 137.033,35.179 136.398,35.814 ; v1(138.938,31.115) 138.938,33.274 136.398,35.814
  B.Cu w0.254: v1(133.604,92.837) 134.112,93.345 151.13,93.345 U7.11@152.4,94.615 ; v1(138.938,31.115) 139.319,31.115 139.827,31.623 140.672,31.623 141.351,31.623 142.621,31.623 ; 141.732,31.623 142.621,31.623 ; J2.26@166.37,23.114 166.37,26.793 167.64,28.063 167.64,31.115 v2(166.37,32.385) 164.084,34.671 152.657,34.671 151.511,34.671 150.368,33.528 144.78,33.528 144.145,32.893 142.875,31.623 142.621,31.623
DACK3#: J2.15 U7.4 | length 174.5
  F.Cu w0.254: v1(141.859,40.132) 141.859,42.164 144.018,44.323 144.018,53.34 144.78,54.102 144.78,71.628 142.875,73.533 142.875,76.693 143.779,77.597 143.779,78.867 142.113,80.533 142.113,108.319 143.649,109.855 U7.4@144.78,109.855
  B.Cu w0.254: v1(141.859,40.132) 142.494,40.767 149.352,40.767 ; 149.396,40.767 150.241,40.767 ; J2.15@194.31,23.114 194.31,26.793 195.58,28.063 195.58,31.115 v2(194.31,32.385) 194.31,33.463 194.31,35.179 193.802,35.687 184.658,35.687 180.086,40.259 ; 149.352,40.767 150.241,40.767 ; 149.352,40.767 179.281,40.767 179.578,40.767 ; 150.241,40.767 179.578,40.767 ; 179.578,40.767 180.086,40.259 ; 179.578,40.767 180.086,40.259
DATA_BUS_ENABLE#: U2.11 U12.19 | length 170.1
  F.Cu w0.254: U2.11@78.74,109.855 79.871,109.855 80.379,110.363 80.379,118.987 80.772,119.38 v1(80.772,119.507) ; v1(226.06,118.745) 226.06,116.205 227.33,114.935 U12.19@228.6,114.935
  B.Cu w0.254: v1(80.772,119.507) 80.772,122.936 81.534,123.698 99.572,123.698 224.917,123.698 226.06,122.555 v1(226.06,118.745)
DIR_TO_CPU: U12.1 U14.8 | length 187.6
  F.Cu w0.254: U14.8@91.44,69.215 93.218,70.993 93.218,77.597 92.71,78.105 92.71,82.467 93.345,83.102 93.345,91.059 92.71,91.694 92.71,118.618 v1(93.599,119.507)
  B.Cu w0.254: v1(93.599,119.507) 93.599,122.047 94.742,123.19 99.782,123.19 219.964,123.19 220.98,122.174 U12.1@220.98,117.475
DRQ1: J2.18 RN2.12 U22.4 | length 152.7
  F.Cu w0.254: RN2.12@91.44,48.895 92.964,48.895 93.98,47.879 93.98,33.147 93.98,32.512 ; v1(93.98,30.861) 93.98,31.75 ; v1@93.98,31.115 93.98,31.75 ; 93.98,31.623 93.98,32.512 ; 93.98,31.75 93.98,32.512
  B.Cu w0.254: U22.4@71.12,48.895 76.073,48.895 77.343,47.625 89.039,47.625 90.309,48.895 RN2.12@91.44,48.895 ; v1(93.98,30.861) 94.878,30.861 97.282,33.265 105.528,33.265 105.537,33.274 106.68,32.131 132.671,32.131 135.211,34.671 140.716,34.671 144.78,38.735 150.455,38.735 ; 150.455,38.735 178.562,38.735 183.642,33.655 185.42,33.655 v2(186.69,32.385) 187.96,31.115 187.96,28.063 186.69,26.793 J2.18@186.69,23.114
DRQ2: J2.6 RN2.8 U22.8 | length 167.3
  F.Cu w0.254: v1(83.82,34.925) RN2.8@83.82,41.275
  B.Cu w0.254: U22.8@78.74,41.275 RN2.8@83.82,41.275 ; v1(83.82,34.925) 84.074,35.179 86.487,35.179 87.503,34.163 92.202,34.163 93.853,35.814 107.442,35.814 109.093,34.163 120.332,34.163 125.158,38.989 125.686,38.989 131.529,44.831 144.018,44.831 ; 143.256,44.831 144.018,44.831 ; J2.6@217.17,23.114 217.17,26.793 218.44,28.063 218.44,31.115 v2(217.17,32.385) 209.804,39.751 186.69,39.751 181.61,44.831 181.566,44.831 176.276,44.831 144.018,44.831
DRQ3: J2.16 RN2.10 U22.6 | length 153
  F.Cu w0.254: RN2.10@91.44,43.815 92.571,43.815 93.472,42.914 93.472,36.449 93.472,33.147 v1(92.329,32.004)
  B.Cu w0.254: U22.6@71.12,43.815 76.073,43.815 77.343,42.545 89.039,42.545 90.309,43.815 RN2.10@91.44,43.815 ; v1(92.329,32.004) 94.234,32.004 96.266,34.036 106.045,34.036 107.442,32.639 132.461,32.639 135.001,35.179 137.033,35.179 140.335,38.481 142.748,38.481 144.018,39.751 149.903,39.751 179.026,39.751 180.848,37.93 184.106,34.671 190.562,34.671 191.77,33.463 v2(191.77,32.385) 193.04,31.115 193.04,28.063 191.77,26.793 J2.16@191.77,23.114
EA0: J1.36 U5.13 U9.3 U19.12 | length 231.4
  F.Cu w0.254: U19.12@172.72,56.515 v1(175.26,59.055) ; v1(179.578,112.395) 179.578,109.728 180.721,108.585 180.721,99.401 180.086,98.766 180.086,91.436 185.928,85.594 185.928,71.755 ; v1(182.88,59.055) 181.991,58.166 181.991,47.371 182.626,46.736 183.007,46.355 v1(195.58,46.355) ; 185.928,71.501 185.928,71.755 ; v1(186.69,59.055) 185.928,59.817 185.928,60.207 185.928,71.755 ; v1(220.98,39.878) 220.98,40.776 v1(220.98,52.832)
  B.Cu w0.254: U5.13@116.84,109.855 126.111,109.855 127.381,111.125 150.241,111.125 150.749,111.633 150.749,113.157 151.257,113.665 168.529,113.665 169.799,112.395 170.688,112.395 U9.3@175.26,112.395 179.07,112.395 v1(179.578,112.395) ; v1(175.26,59.055) 180.34,59.055 v1(182.88,59.055) 184.531,59.055 ; 185.547,59.055 184.912,59.055 ; v1@186.055,59.055 185.801,59.055 ; v1@186.182,59.055 184.531,59.055 ; v1(186.69,59.055) 185.801,59.055 ; v1(195.58,46.355) 198.247,46.355 198.755,46.863 200.914,46.863 203.962,43.815 213.614,43.815 217.551,39.878 v1(220.98,39.878) ; v1(220.98,52.832) 222.631,52.832 222.885,52.832 223.266,52.451 231.457,52.451 231.902,52.895 232.283,53.276 240.03,53.276 240.068,53.315 J1.36@243.967,53.315 ; 184.531,59.055 184.912,59.055 ; 184.912,59.055 185.157,59.055 185.801,59.055
EA1: J1.15 U5.3 U9.4 U19.14 | length 259.3
  F.Cu w0.254: v1(107.188,116.205) 107.188,113.03 107.823,112.395 U5.3@109.22,112.395 ; v1(172.212,109.855) v1(172.212,116.205) ; U19.14@172.72,61.595 v1(175.26,64.135) ; v1(180.975,109.855) 181.229,109.601 181.229,99.187 180.594,98.552 180.594,91.647 186.436,85.805 186.436,71.291 186.436,63.373 v1(186.944,62.865) v1@186.944,62.992 ; v1(182.88,64.135) 181.483,62.738 181.483,46.399 182.162,45.72 182.67,45.212 v1(196.977,45.212) ; v1(219.71,38.227) 219.71,47.879 v1(219.71,51.689)
  B.Cu w0.254: v1(107.188,116.205) 107.188,119.888 107.569,120.269 ; 107.315,120.015 107.569,120.269 ; v1(172.212,109.855) U9.4@175.26,109.855 ; v1(172.212,116.205) 172.212,120.269 171.45,121.031 108.331,121.031 107.569,120.269 ; v1@172.593,109.855 173.101,109.855 U9.4@175.26,109.855 ; v1(175.26,64.135) 180.34,64.135 v1(182.88,64.135) 185.674,64.135 v1(186.944,62.865) ; v1(180.975,109.855) 180.594,109.855 U9.4@175.26,109.855 ; v1(196.977,45.212) 197.875,45.212 198.51,45.847 200.533,45.847 203.073,43.307 213.36,43.307 218.44,38.227 v1(219.71,38.227) ; v1(219.71,51.689) 221.361,51.689 231.648,51.689 232.664,52.705 239.498,52.705 240.133,52.07 J1.15@241.3,52.07
EA2: J1.41 U4.3 U9.7 U19.16 | length 291.5
  F.Cu w0.254: v1(99.695,112.395) 99.695,113.293 v1(99.695,119.507) ; U19.16@172.72,66.675 v1(175.26,69.215) ; U9.7@175.26,102.235 173.965,103.53 173.965,113.132 174.498,113.665 176.53,113.665 177.927,115.062 178.943,115.062 179.959,116.078 v1(179.959,117.475) ; 182.074,43.942 181.947,44.069 ; v1(182.88,69.215) 181.864,68.199 181.864,65.786 180.975,64.897 180.975,45.041 181.947,44.069 ; v1(185.42,102.235) 185.42,93.218 186.436,92.202 186.944,91.694 186.944,86.015 186.944,70.231 v1(187.96,69.215) v1@187.706,69.469 ; v1(197.739,43.561) 182.455,43.561 181.947,44.069 ; J1.41@243.967,41.25 246.997,41.25 247.023,41.275 248.666,41.275 v1(249.809,41.275)
  B.Cu w0.254: U4.3@96.52,112.395 98.806,112.395 ; v1@99.568,112.395 98.806,112.395 ; v1(99.695,112.395) 98.806,112.395 ; v1(99.695,119.507) 99.695,121.285 100.584,122.174 104.648,122.174 107.359,122.174 177.8,122.174 ; v1(175.26,69.215) 180.34,69.215 v1(182.88,69.215) 186.563,69.215 ; U9.7@175.26,102.235 180.086,102.235 181.267,101.054 184.239,101.054 v1(185.42,102.235) ; 179.197,120.777 177.8,122.174 ; v1(179.959,117.475) 179.959,120.015 177.8,122.174 ; 186.944,69.215 186.563,69.215 ; 187.198,69.215 186.817,69.215 ; v1(187.96,69.215) 186.817,69.215 ; v1(197.739,43.561) 200.406,43.561 201.676,42.291 205.784,42.291 210.987,42.291 216.702,36.576 232.283,36.576 233.934,34.925 235.712,34.925 236.474,35.687 239.014,35.687 239.776,34.925 247.015,34.925 ; 247.142,34.925 247.015,34.925 ; v1(249.809,41.275) 249.809,36.83 247.904,34.925 247.015,34.925 ; 186.563,69.215 186.817,69.215
EA3: J1.16 U9.8 U16.5 U19.18 | length 274.2
  F.Cu w0.254: v1(107.061,68.453) 107.061,73.267 108.089,74.295 U16.5@109.22,74.295 ; v1(167.132,70.485) 167.132,77.851 168.275,78.994 172.428,78.994 173.825,80.391 173.825,98.26 174.46,98.895 U9.8@175.26,99.695 ; U19.18@172.72,71.755 173.52,72.555 173.99,73.025 174.879,73.025 ; 175.387,73.025 174.879,73.025 ; v1(177.165,74.295) 175.895,73.025 174.879,73.025 ; v1(182.88,74.295) 181.864,74.295 181.356,73.787 181.356,66.167 180.467,65.278 180.467,65.107 180.467,44.577 182.118,42.926 182.626,42.418 v1(199.009,42.418) ; v1(186.69,99.695) 186.69,92.837 187.452,92.075 187.452,91.44 187.452,75.565 v1(188.722,74.295) ; v1(236.982,34.417) 236.982,35.179 237.49,35.687 238.173,35.687 239.903,37.417 239.903,37.719 239.903,49.427 240.133,49.657 J1.16@241.3,49.657
  B.Cu w0.254: v1@107.061,68.676 v1(107.061,68.453) 107.569,67.945 113.03,67.945 115.57,70.485 142.494,70.485 145.034,73.025 150.749,73.025 153.289,70.485 v1(167.132,70.485) ; U9.8@175.26,99.695 180.213,99.695 181.483,98.425 183.896,98.425 184.023,98.425 185.293,99.695 185.928,99.695 ; v1(177.165,74.295) 178.181,74.295 180.34,74.295 v1(182.88,74.295) 186.944,74.295 ; v1@186.182,99.695 185.928,99.695 ; v1(186.69,99.695) 185.928,99.695 ; 187.706,74.295 186.944,74.295 ; v1(188.722,74.295) 186.944,74.295 ; v1(199.009,42.418) 199.907,42.418 200.542,41.783 205.994,41.783 210.776,41.783 216.491,36.068 231.14,36.068 232.918,34.29 233.553,33.655 234.95,33.655 236.22,33.655 v1(236.982,34.417)
EA4: J1.18 U2.9 U9.13 U19.3 | length 307
  F.Cu w0.254: U2.9@78.74,104.775 80.01,103.505 80.01,97.917 ; v1(80.01,96.774) 80.01,97.917 ; 80.01,97.409 80.01,97.917 ; v1(101.346,98.044) 101.346,110.363 101.219,110.49 100.965,110.744 100.965,115.57 101.727,116.332 v1(101.727,119.507) ; v1(173.482,100.965) 173.482,101.631 173.482,115.443 174.244,116.205 178.054,116.205 v1(178.435,116.586) ; v1(178.054,100.965) 178.054,90.551 183.896,84.709 183.896,72.771 v1(182.88,71.755) ; v1(236.855,73.99) 236.855,73.914 237.363,73.406 237.363,63.5 238.76,62.103 238.76,46.609 238.76,45.339 v1(238.379,44.958)
  B.Cu w0.254: v1(80.01,96.774) 80.137,96.774 80.645,97.282 100.584,97.282 v1(101.346,98.044) ; v1(101.727,119.507) 101.727,120.904 102.489,121.666 177.419,121.666 178.816,120.269 178.816,116.967 v1(178.435,116.586) ; U19.3@165.1,71.755 170.053,71.755 171.323,70.485 176.784,70.485 178.054,71.755 180.34,71.755 v1(182.88,71.755) 190.119,71.755 192.532,74.168 197.612,74.168 199.009,75.565 218.567,75.565 220.472,73.66 232.156,73.66 232.562,74.066 235.839,74.066 ; v1(173.482,100.965) 174.498,100.965 v1(178.054,100.965) ; v1@177.673,100.965 v1(178.054,100.965) ; U9.13@182.88,99.695 181.356,99.695 180.086,100.965 v1(178.054,100.965) ; 236.195,74.066 235.839,74.066 ; v1(236.855,73.99) 236.779,74.066 235.839,74.066 ; v1(238.379,44.958) 239.141,44.958 239.268,44.831 J1.18@241.3,44.831
EA5: J1.9 U9.14 U16.4 U19.5 | length 281.3
  F.Cu w0.254: U16.4@109.22,76.835 110.49,75.565 110.49,67.722 ; v1(110.49,66.802) 110.49,67.722 ; v1@110.49,67.183 110.49,67.722 ; v1(119.38,66.802) 119.38,67.945 119.38,74.676 121.92,77.216 v1(121.92,82.296) ; v1@178.816,103.378 v1(178.689,103.378) 179.197,102.87 179.197,100.203 178.562,99.568 178.562,90.805 184.404,84.963 184.404,72.561 184.404,72.386 184.404,67.056 184.023,66.675 v1(182.88,66.675) ; v1(179.832,66.675) 179.832,67.573 v1(179.832,76.835) ; v1(190.754,64.77) 190.754,63.872 191.008,63.618 191.008,56.007 199.009,48.006 199.009,46.101 v1(199.009,44.704) ; v1(235.331,36.195) 237.998,36.195 239.395,37.592 239.395,48.387 239.268,48.514 239.268,50.673 239.395,50.8 239.395,57.531 239.522,57.658 239.522,64.008 239.513,64.008 238.506,65.015 v1(238.506,65.913)
  B.Cu w0.254: v1(110.49,66.802) 118.237,66.802 v1(119.38,66.802) ; v1(121.92,82.296) 122.682,82.296 ; v1@122.174,82.296 122.682,82.296 ; U19.5@165.1,66.675 169.672,66.675 170.942,65.405 174.371,65.405 175.768,65.405 ; 176.53,65.405 175.768,65.405 ; v1@178.816,103.378 180.606,103.378 181.749,102.235 U9.14@182.88,102.235 ; v1(179.832,76.835) 178.054,76.835 176.657,78.232 162.433,78.232 158.369,82.296 122.682,82.296 ; 180.467,66.675 180.594,66.675 ; v1(190.754,64.77) 188.722,64.77 186.817,66.675 v1(182.88,66.675) 181.737,66.675 180.594,66.675 ; v1(199.009,44.704) 200.279,44.704 202.184,42.799 205.573,42.799 211.197,42.799 216.912,37.084 233.045,37.084 233.934,36.195 v1(235.331,36.195) ; v1(238.506,65.913) 239.141,66.548 239.522,66.548 J1.9@241.3,66.548 ; 175.768,65.405 178.562,65.405 v1(179.832,66.675) 180.594,66.675
EA6: J1.38 U9.17 U16.2 U19.7 | length 264.3
  F.Cu w0.254: v1@106.68,86.36 106.68,85.471 ; v1(106.68,86.741) 106.68,85.471 ; U16.2@109.22,81.915 107.569,81.915 106.68,82.804 106.68,85.471 ; v1(178.435,61.595) 178.435,70.104 178.435,77.216 ; v1@178.435,78.232 178.435,77.216 ; v1(178.435,78.74) 178.435,77.216 ; U9.17@182.88,109.855 184.15,111.125 184.15,113.157 183.642,113.665 180.975,113.665 180.467,114.173 178.562,114.173 177.673,113.284 177.673,109.982 179.705,107.95 179.705,99.822 179.07,99.187 179.07,91.015 184.912,85.173 184.912,72.176 184.912,63.627 184.658,63.373 v1(182.88,61.595) 184.15,60.325 184.15,48.133 184.785,47.498 v1(197.612,47.498)
  B.Cu w0.254: v1(106.68,86.741) 106.934,86.487 123.444,86.487 127.127,82.804 158.623,82.804 162.687,78.74 176.561,78.74 v1(178.435,78.74) ; U19.7@165.1,61.595 169.926,61.595 171.196,60.325 173.736,60.325 ; 174.498,60.325 173.736,60.325 ; 180.34,61.595 180.086,61.595 ; v1(182.88,61.595) 180.086,61.595 ; v1(197.612,47.498) 201.549,47.498 203.327,45.72 220.726,45.72 221.234,45.212 229.489,45.212 232.766,48.489 J1.38@243.967,48.489 ; 173.736,60.325 175.26,60.325 177.165,60.325 v1(178.435,61.595) 180.086,61.595